# Altium PCB PCB1.PcbDoc
Units mil, origin at the board's own origin, x right, y up, seen from the top; angles counter-clockwise.
Board outline 6000 x 4000 mil, 2 copper layers (Top Layer, Bottom Layer); 7 components, 5 nets, 15 pads, 0 vias.
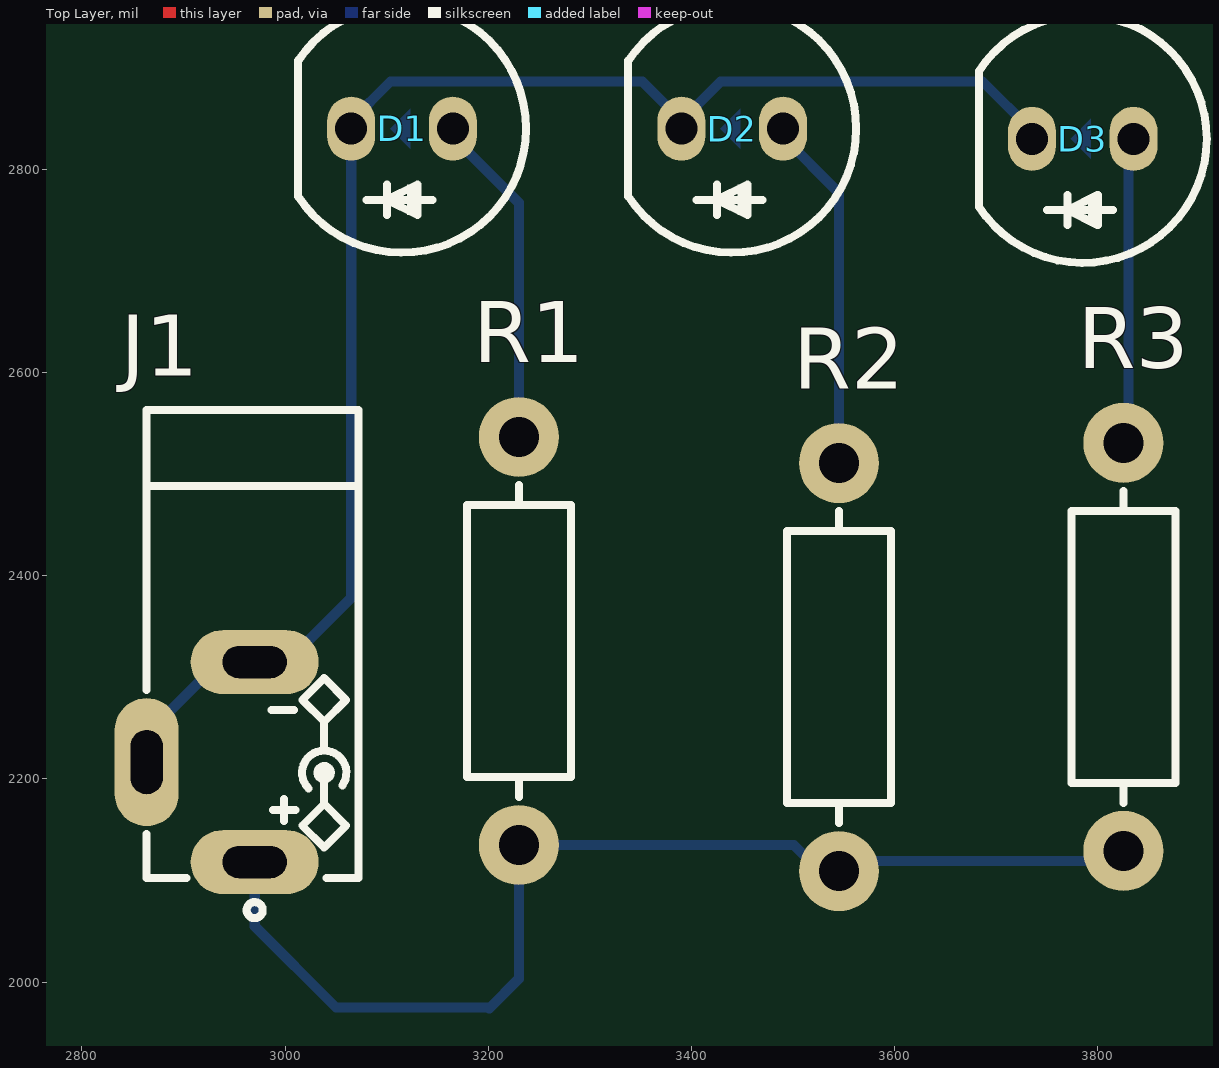
[diagram p0: Top Layer view]
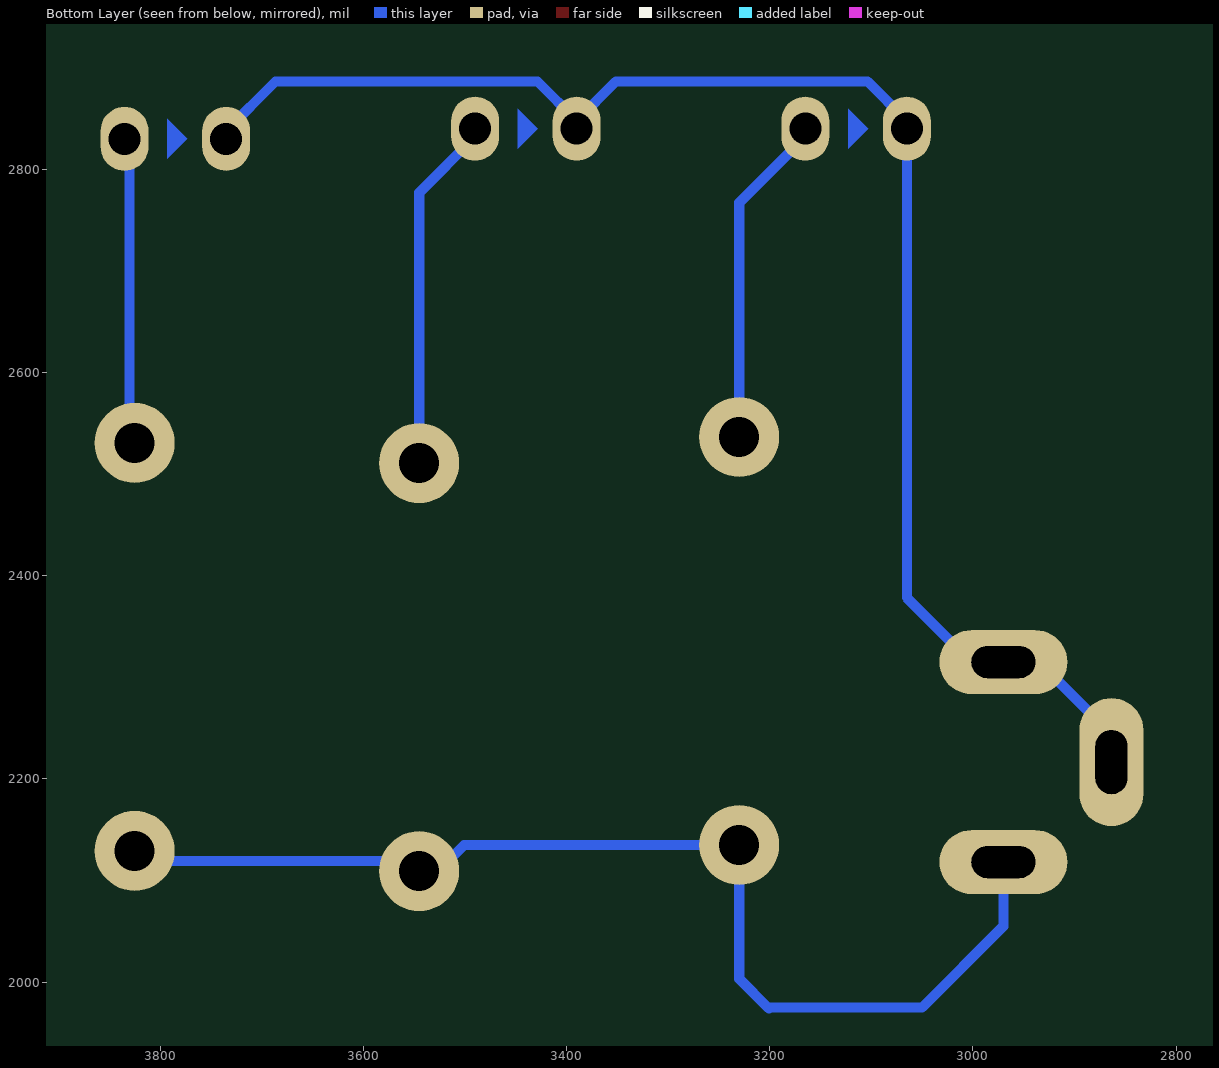
[diagram p1: Bottom Layer view, seen from below]
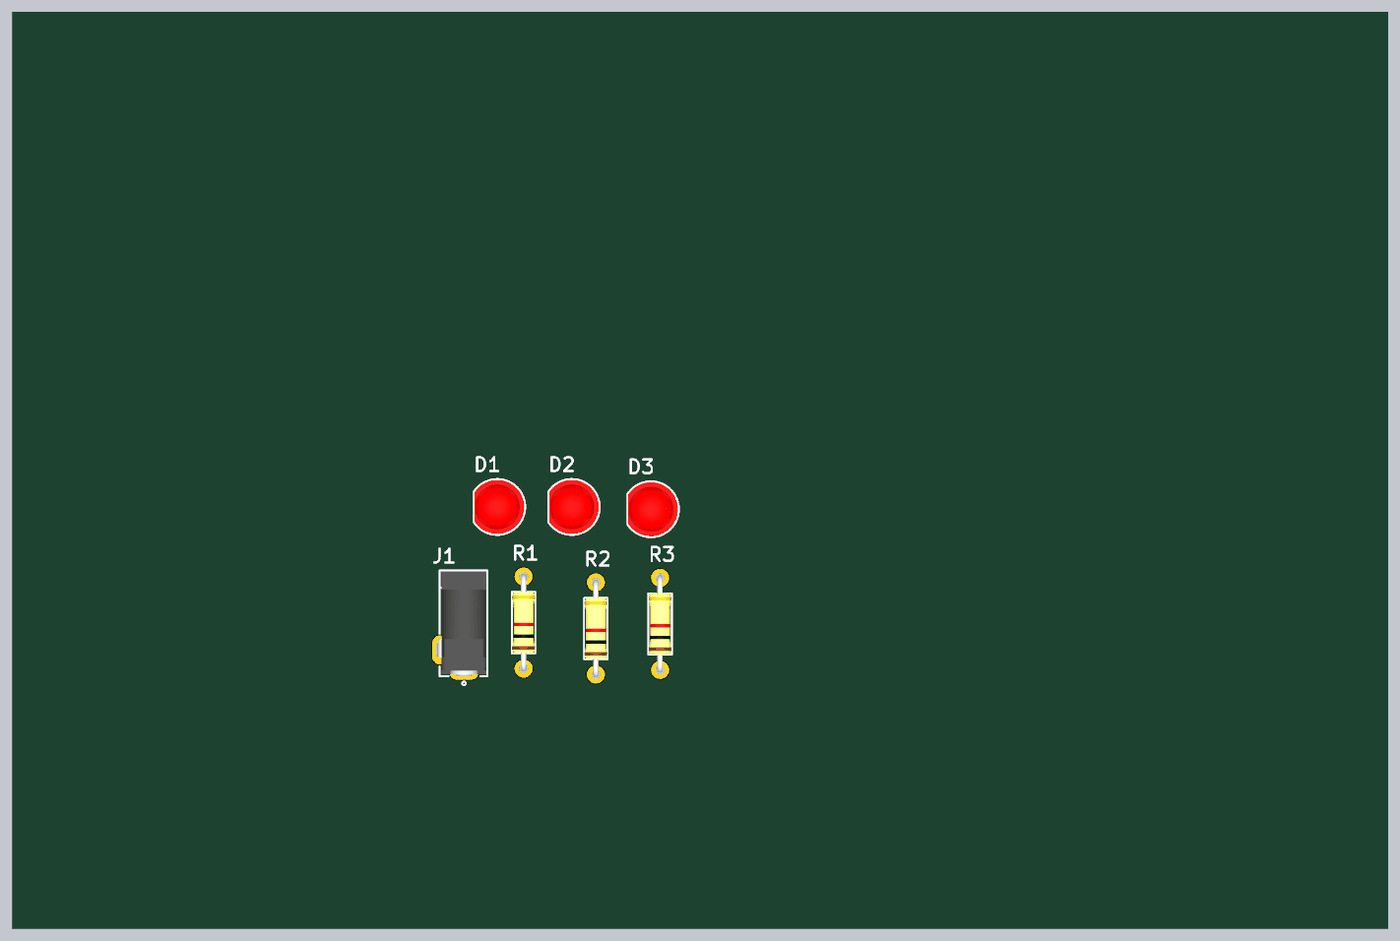
[diagram p2: 3D render of the assembled board from above, using the file's embedded part models]

## Layer stack, top to bottom
Top Solder: solder mask 0.4, Solder Resist, Dk 3.5
Top Layer: signal copper 1.4
Dielectric 1: dielectric 12.6, FR-4, Dk 4.8
Bottom Layer: signal copper 1.4
Bottom Solder: solder mask 0.4, Solder Resist, Dk 3.5

## Board outline
1000,1000 7000,1000 7000,5000 1000,5000

## Design rules (kind name [scope] priority, off if disabled: settings)
Clearance [All] p1: gap=10 ignorepadtopadclearanceinfootprint=FALSE
PolygonConnect [All] p1: connectstyle=Relief reliefconductorwidth=10 reliefentries=4 polygonreliefangle="90 Angle" airgapwidth=10
RoutingVias [All] p1: holewidth=28 width=50 viastyle="Through Hole" minholewidth=28 minwidth=50 maxholewidth=28 maxwidth=50
SolderMaskExpansion [All] p1: expansion=4 istentingtop=FALSE
Width [All] p1: maxlimit=10 minlimit=10 preferedwidth=10
30 further rules are at their usual default settings.

## Components (designator, comment, footprint, x,y, rotation, side; value= is the part's Value field where it differs from the comment)
D1 "LED5MM_RED" LED5MM_RED 3115,2840 r180 top
D2 "LED5MM_RED" LED5MM_RED 3440,2840 r180 top
D3 "LED5MM_RED" LED5MM_RED 3785,2830 r180 top
J1 "DC_POWER_JACK" JAC_PWR1 2970,2118.15 r0 top
R1 "10K" R025W_AX04 3230,2335.79 r90 top
R2 "10K" R025W_AX04 3545,2310 r90 top
R3 "10K" R025W_AX04 3825,2330 r90 top

## Footprints (in the part's own frame and the unit in brackets; to place one, negate y for a bottom-side part, rotate by r counter-clockwise, add the part's x,y. Pads: shape width x height; smd on the part's side, far side on the other; paste and mask are expansions set on the pad)
JAC_PWR1 [mm] "DC POWER JACK, 1mm, Power Jack PJ-031C"
  oval 3.2x1.6 hole 0.8 slot 1.6 at 0 deg: 1(0,0) 2(0,5)
  oval 1.6x3.2 hole 0.8 slot 1.6 at 90 deg: 3(-2.7,2.5)
  silkscreen extent -2.7,-1.4 2.6,11.3, body extent -2.9,-0.4 2.5,11.2, height 7.4
LED5MM_RED [mm] "LED THD 5MM RED"
  oval 1.2x1.6 hole 0.8: 1(-1.27,0) 2(1.27,0)
  Bottom Layer region: -0.2,0.5 -0.2,-0.5 0.3,0
  silkscreen extent -3.1,-3.1 2.6,3.1, body extent -3,-3 2.5,3, height 9.14
R025W_AX04 [mm] "RESISTOR 1/4 WATT, AXIAL0.4"
  round 2 hole 1: 1(-5.1,0) 2(5.1,0)
  silkscreen extent -3.9,-1.3 3.9,1.3, body extent -5.38,-1.28 5.38,1.28, height 2.6

## Part data
D1 D2 D3: library part LED_THD_5MM_RED, "LED, THD, 5MM, RED", ASSEMBLY=ASSEMBLY, DESC=DESCRIPTION, MANF=MANF, MANF_P#=MANF_PART#, PARAM2=2.2V, PRICE=PRICE
J1: library part CONN_PWR_JACKR1, "CONN, PWR JACK DC, PLUG DIAM 1.0MM RA THD", MANF="CUI STACK", MANF_P#="PJ-031CH, PJ-031C", PARAM="CH 3A, C 2A"
R1 R2 R3: library part RES_THD, "RESISTOR, THD", ASSEMBLY=ASSEMBLY, DESC=DESCRIPTION, DIST#=MOUSER, MANF="KOA SPEER", MANF_P#=RK73H1ETTP4701F, PARAM=0.063W, PARAM2=1%, PRICE="100= 0.5$"

## Nets (pads, with @x,y where several pads share a name; then routed paths per layer and width w, separated by ;. In a path a pad name is that pad's centre, name@x,y a point inside that pad or via, vN(x,y) a via of type N, cw(c..) or ccw(c..) an arc to the next point about the centre after c; other vN are vias at no path point)
GND: D1.2 D2.2 D3.2 J1.2 J1.3 | length 1507.8
  Bottom Layer w10: J1.3 2863.7,2244.13 2934.57,2315 J1.2 3001.5,2315 3065,2378.5 D1.2 3065,2847.87 3103.62,2886.5 3351.38,2886.5 D2.2@3390,2847.87 ; D2.2 D2.2@3390,2847.87 ; D3.2 3735,2837.87 3686.38,2886.5 3428.62,2886.5 D2.2@3390,2847.87
NetD1_1: D1.1 R1.2 | length 330.3
  Bottom Layer w10: D1.1 3165,2832.13 3230,2767.13 R1.2
NetD2_1: D2.1 R2.2 | length 352
  Bottom Layer w10: D2.1 3490,2832.13 3545,2777.13 R2.2
NetD3_1: D3.1 R3.2 | length 303.4
  Bottom Layer w10: R3.2 3830,2535.79 3830,2825 D3.1
VCC: J1.1 R1.1 R2.1 R3.1 | length 1114.4
  Bottom Layer w10: J1.1 2970,2055 3050,1975 3200,1975 3200.86,1974.14 3230,2003.28 R1.1 3500.61,2135 3526.4,2109.21 R2.1 3555,2119.21 3815,2119.21 R3.1